# EAGLE board Board_iTEAD (EAGLE 7.2.0)
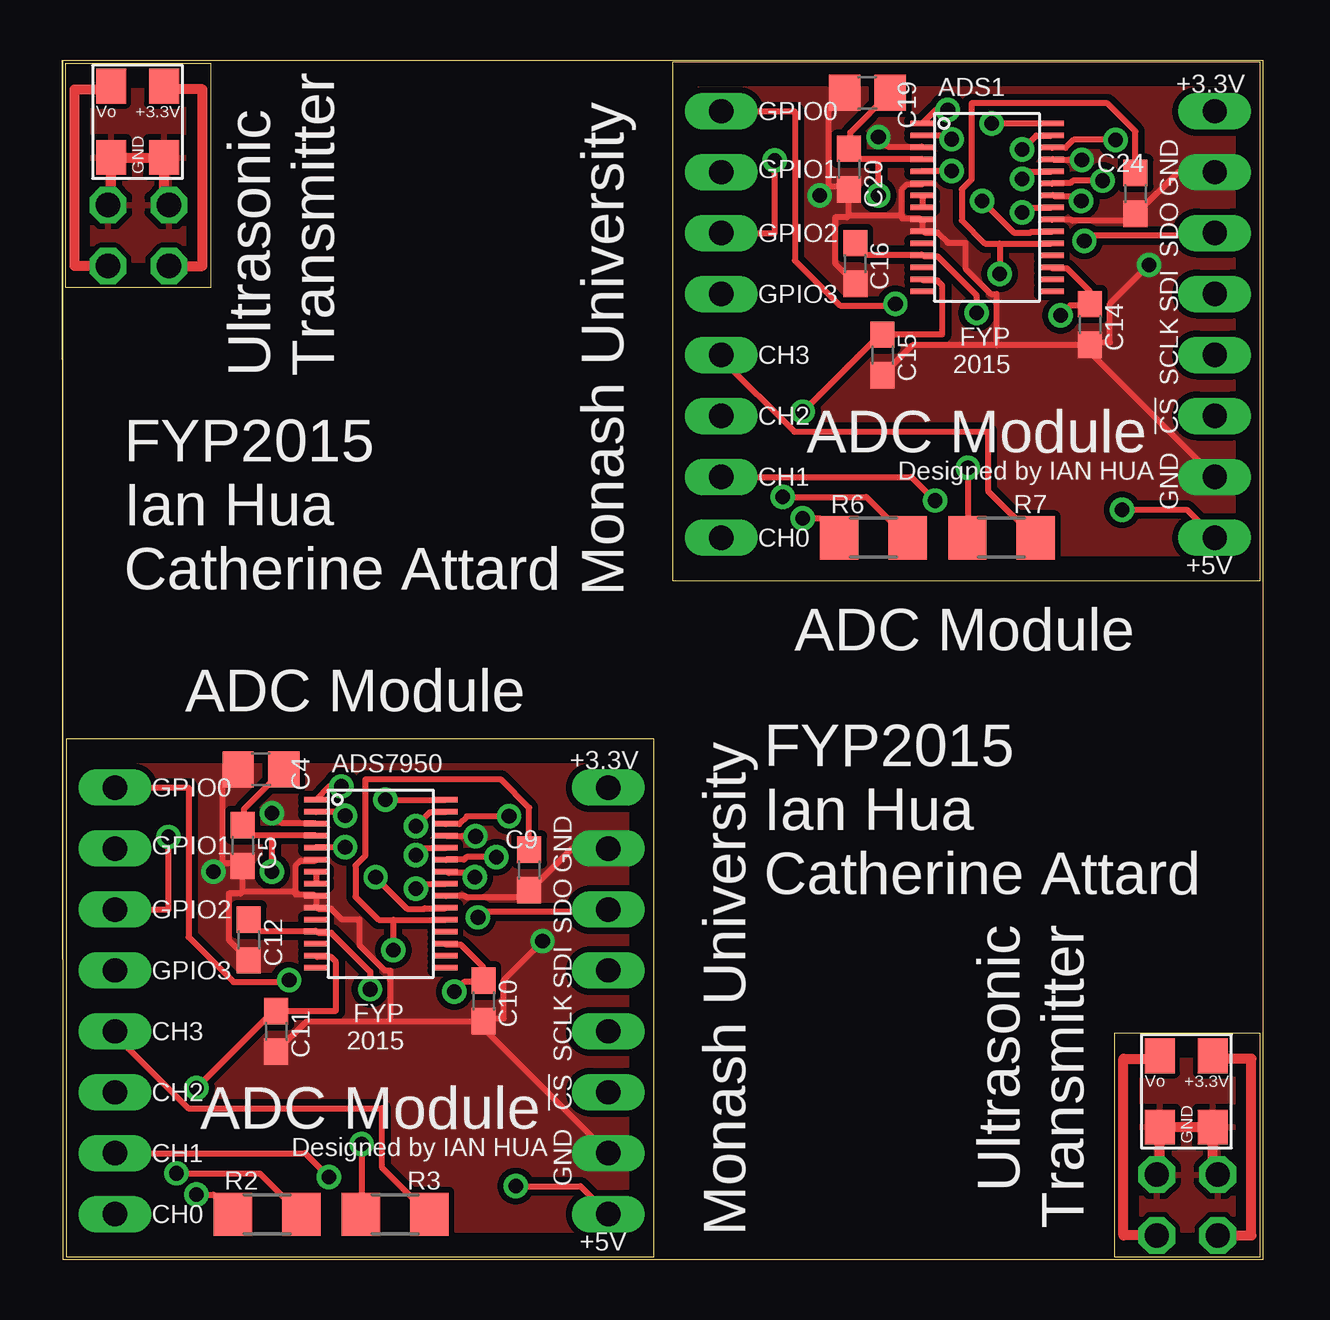
[diagram p0: board, top side]
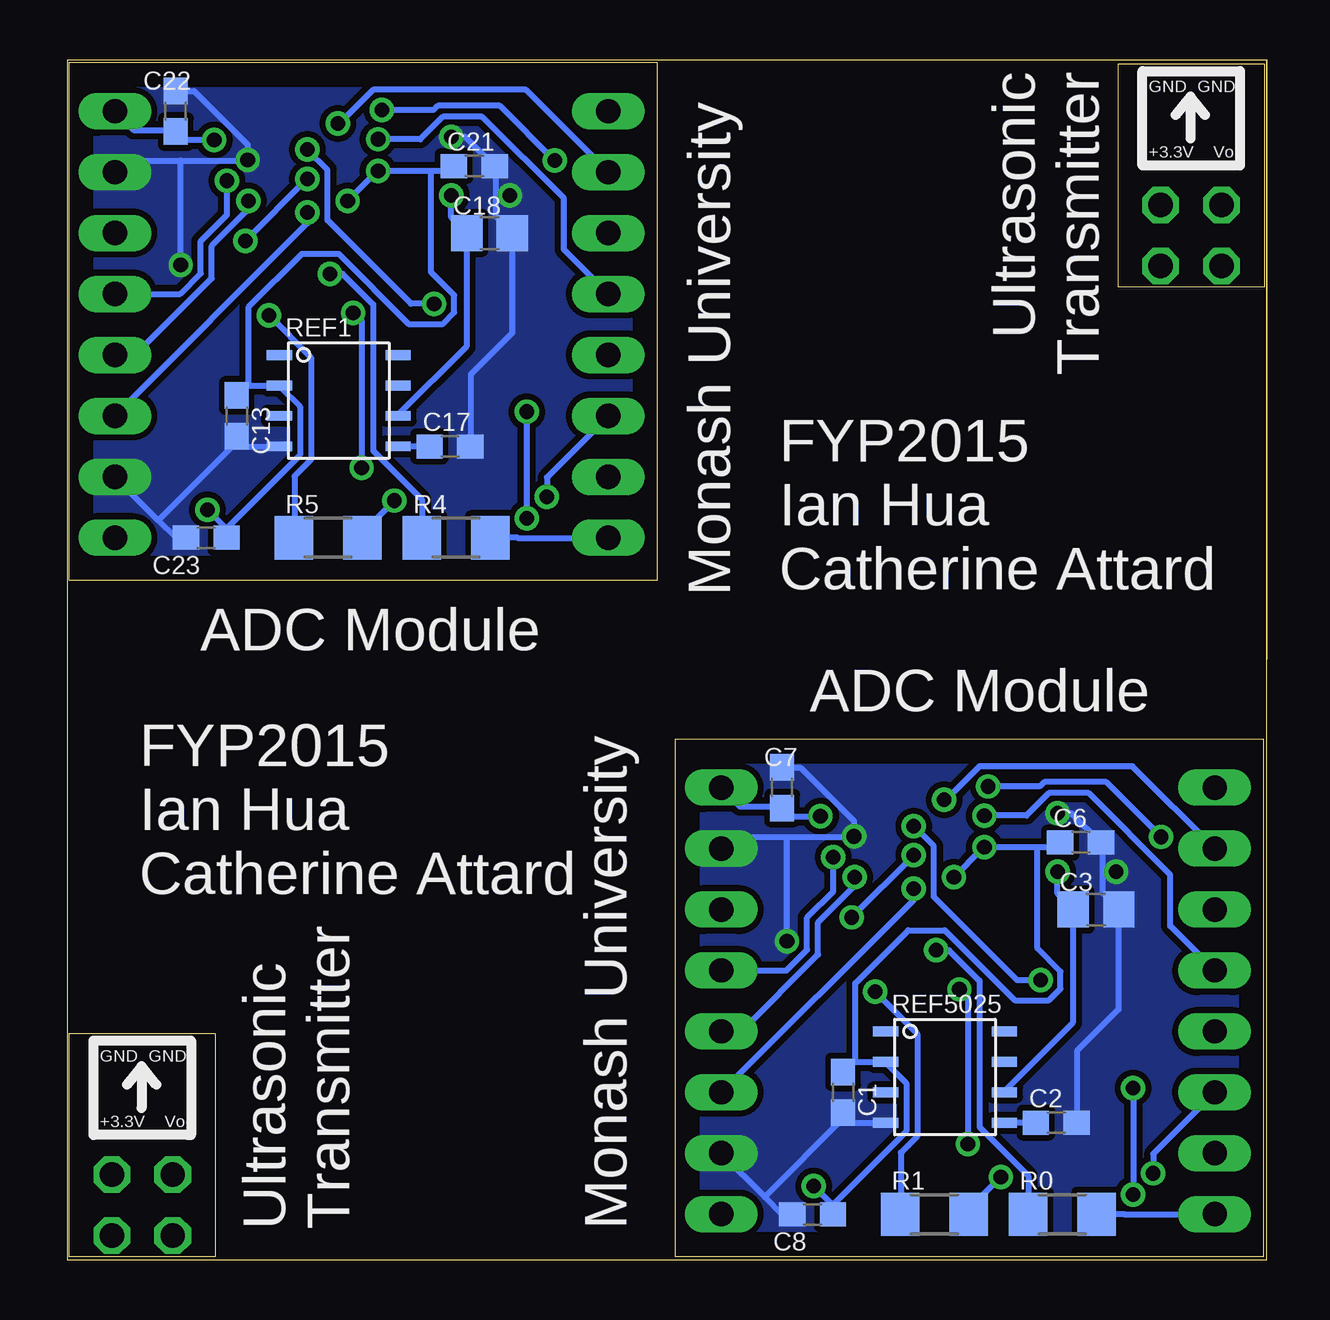
[diagram p1: board, bottom side, seen from below]

Size 50.02 x 50.02 mm. Coordinates in mm from the lower left corner, seen from the top.
Outline: 0.03,0 0,50.02 50.02,50
Outline: 50.02,50 50.02,0
Outline: 50.02,0 0.03,0
Outline: 0.03,0 0.03,50 50.02,50
Outline: 50.02,50 50.02,0
Outline: 50.02,0 0.03,0
Outline: 0.15,0.13 24.66,0.13 24.66,21.72 0.15,21.72 0.15,0.13
Outline: 25.42,28.32 49.94,28.32 49.94,49.91 25.42,49.91 25.42,28.32
Outline: 0.12,40.54 6.21,40.54 6.21,49.86 0.12,49.86 0.12,40.54
Outline: 43.84,0.13 49.92,0.13 49.92,9.45 43.84,9.45 43.84,0.13
Copper layers (1*16): Top 0.035mm / dielectric 1.5mm / Bottom 0.035mm
Design rules "default": minimum track width 10mil, minimum drill 24mil, track to track 8mil, track to pad 8mil, pad to pad 8mil, via to via 8mil, smd to smd 8mil, copper to edge 40mil, drill to drill 8mil, minimum pad ring 10mil, minimum via ring 8mil, stop-mask expansion 4mil, vias tented up to drill 0mil, thermal gap 10mil

## Footprints (pad centres in the part's own frame; a part is rotated, then mirrored left to right if it is on the bottom)
TSSOP-30 = smd 0.22 x 1: P$1 0,0; P$2 0.5,0; P$3 1,0; P$4 1.5,0; P$5 2,0; P$6 2.5,0; P$7 3,0; P$8 3.5,0; P$9 4,0; P$10 4.5,0; P$11 5,0; P$12 5.5,0; P$13 6,0; P$14 6.5,0; P$15 7,0; P$16 7,5.4; P$17 6.5,5.4; P$18 6,5.4; P$19 5.5,5.4; P$20 5,5.4; P$21 4.5,5.4; P$22 4,5.4; P$23 3.5,5.4; P$24 3,5.4; P$25 2.5,5.4; P$26 2,5.4; P$27 1.5,5.4; P$28 1,5.4; P$29 0.5,5.4; P$30 0,5.4
C0603 = smd 1.1 x 1: 1 -0.85,0; 2 0.85,0
C0805 = smd 1.3 x 1.5: 1 -0.95,0; 2 0.95,0
1X08 = drill 1.016 long: 1 -8.89,0; 2 -6.35,0; 3 -3.81,0; 4 -1.27,0; 5 1.27,0; 6 3.81,0; 7 6.35,0; 8 8.89,0
2X02 = drill 1.016 octagon: 1 -1.27,-1.27; 2 -1.27,1.27; 3 1.27,-1.27; 4 1.27,1.27
R1206 = smd 1.6 x 1.803: 1 -1.422,0; 2 1.422,0
SOIC-8 = smd 0.41 x 1.05: P$1 0,0; P$2 1.27,0; P$3 2.54,0; P$4 3.81,0; P$5 3.81,4.95; P$6 2.54,4.95; P$7 1.27,4.95; P$8 0,4.95
KNOWLES_SPM = smd 1.245 x 1.448: P$1 -1.016,1.27; P$2 -1.016,-1.702; P$3 1.194,-1.702; P$4 1.194,1.27

## Placement (x,y rotation side)
ADS1  ADS7950  [TSSOP-30]  35.84,47.37 270 top
ADS7950  ADS7950  [TSSOP-30]  10.57,19.18 270 top
C1  1.0uF  [C0603]  17.68,6.99 270 bottom
C2  1.0uF  [C0603]  8.79,5.71 0 bottom
C3  10uF  [C0805]  7.14,14.61 0 bottom
C4  10uF  [C0805]  8.28,20.45 180 top
C5  1.0uF  [C0603]  7.52,17.27 270 top
C6  1.0uF  [C0603]  7.77,17.4 0 bottom
C7  0.1uF  [C0603]  20.22,19.68 90 bottom
C8  0.1uF  [C0603]  18.95,1.91 180 bottom
C9  270pF  [C0603]  19.46,16.26 270 top
C10  270pF  [C0603]  17.55,10.79 270 top
C11  270pF  [C0603]  8.92,9.53 270 top
C12  270pF  [C0603]  7.77,13.34 270 top
C13  1.0uF  [C0603]  42.95,35.18 270 bottom
C14  270pF  [C0603]  42.82,38.99 270 top
C15  270pF  [C0603]  34.19,37.72 270 top
C16  270pF  [C0603]  33.05,41.53 270 top
C17  1.0uF  [C0603]  34.06,33.91 0 bottom
C18  10uF  [C0805]  32.41,42.8 0 bottom
C19  10uF  [C0805]  33.55,48.64 180 top
C20  1.0uF  [C0603]  32.79,45.47 270 top
C21  1.0uF  [C0603]  33.05,45.59 0 bottom
C22  0.1uF  [C0603]  45.49,47.88 90 bottom
C23  0.1uF  [C0603]  44.22,30.1 180 bottom
C24  270pF  [C0603]  44.73,44.45 270 top
JP1  Left Header  [1X08]  2.18,10.79 270 top
JP2  Right Header  [1X08]  22.76,10.79 270 top
JP3  Left Header  [1X08]  27.46,38.99 270 top
JP4  Right Header  [1X08]  48.03,38.99 270 top
JP5  [2X02]  3.17,42.7 90 top
JP6  [2X02]  46.89,2.29 90 top
R0  33Ohm  [R1206]  8.53,1.91 0 bottom
R1  33Ohm  [R1206]  13.87,1.91 0 bottom
R2  33Ohm  [R1206]  8.53,1.91 0 top
R3  33Ohm  [R1206]  13.87,1.91 0 top
R4  33Ohm  [R1206]  33.81,30.1 0 bottom
R5  33Ohm  [R1206]  39.14,30.1 0 bottom
R6  33Ohm  [R1206]  33.81,30.1 0 top
R7  33Ohm  [R1206]  39.14,30.1 0 top
REF1  REF5025  [SOIC-8]  41.17,37.72 270 bottom
REF5025  REF5025  [SOIC-8]  15.9,9.53 270 bottom
SPM0404UD1  SPM0404UD5  [KNOWLES_SPM]  46.76,7.24 0 top
SPM0404UD5  SPM0404UD5  [KNOWLES_SPM]  3.04,47.65 0 top

## Library data of the parts
ADS1 ADS7950 REF1 REF5025 SPM0404UD1 SPM0404UD5 = Ian
C1-C24 R0 R1-R7 = rcl
JP1-JP6 = Ian_Header

## Nets
+3V1: ADS1.P$28 C22.1 JP4.1
+3V2: JP5.1 SPM0404UD5.P$4
+3V3: ADS7950.P$28 C7.1 JP2.1
+3V4: JP6.1 SPM0404UD1.P$4
+5V: ADS7950.P$5 ADS7950.P$21 C1.1 C6.1 C8.1 JP2.8 REF5025.P$2
+5V1: ADS1.P$5 ADS1.P$21 C13.1 C21.1 C23.1 JP4.8 REF1.P$2
GND: ADS7950.P$3 ADS7950.P$6 ADS7950.P$9 ADS7950.P$10 ADS7950.P$22 ADS7950.P$27 C1.2 C2.2 C3.2 C4.2 C5.2 C6.2 C7.2 C8.2 C9.2 C10.2 C11.2 C12.2 JP2.2 JP2.7 REF5025.P$4
GND1: ADS1.P$3 ADS1.P$6 ADS1.P$9 ADS1.P$10 ADS1.P$22 ADS1.P$27 C13.2 C14.2 C15.2 C16.2 C17.2 C18.2 C19.2 C20.2 C21.2 C22.2 C23.2 C24.2 JP4.2 JP4.7 REF1.P$4
GND2: JP5.3 JP5.4 SPM0404UD5.P$2 SPM0404UD5.P$3
GND3: JP6.3 JP6.4 SPM0404UD1.P$2 SPM0404UD1.P$3
N$1: C2.1 REF5025.P$5
N$2: C17.1 REF1.P$5
N$3: ADS7950.P$29 JP1.1
N$4: ADS7950.P$7 ADS7950.P$8
N$5: ADS7950.P$30 JP1.2
N$6: ADS7950.P$1 JP1.3
N$7: ADS7950.P$2 JP1.4
N$8: ADS1.P$29 JP3.1
N$9: JP1.7 R1.2
N$10: JP1.6 R2.2
N$11: JP1.5 R3.2
N$12: ADS1.P$30 JP3.2
N$13: ADS7950.P$18 C10.1 R1.1
N$14: ADS7950.P$14 C11.1 R2.1
N$15: JP1.8 R0.2
N$16: ADS7950.P$23 JP2.6
N$17: ADS7950.P$12 C12.1 R3.1
N$18: ADS7950.P$26 JP2.3
N$19: ADS7950.P$25 JP2.4
N$20: ADS7950.P$24 JP2.5
N$21: ADS7950.P$20 C9.1 R0.1
N$22: ADS1.P$1 JP3.3
N$23: ADS1.P$2 JP3.4
N$24: JP3.8 R4.2
N$25: JP3.7 R5.2
N$26: JP3.6 R6.2
N$27: JP3.5 R7.2
N$28: ADS1.P$18 C14.1 R5.1
N$29: ADS1.P$14 C15.1 R6.1
N$30: ADS1.P$12 C16.1 R7.1
N$31: ADS1.P$26 JP4.3
N$32: ADS1.P$25 JP4.4
N$33: ADS1.P$24 JP4.5
N$34: ADS1.P$23 JP4.6
N$35: ADS1.P$20 C24.1 R4.1
N$36: ADS1.P$7 ADS1.P$8
N$37: JP5.2 SPM0404UD5.P$1
N$38: JP6.2 SPM0404UD1.P$1
REFP: ADS7950.P$4 C3.1 C4.1 C5.1 REF5025.P$6
REFP1: ADS1.P$4 C18.1 C19.1 C20.1 REF1.P$6

## Tracks (layer width: path | path; a pad name or v marks a point on that pad's centre or on a via)
+3V1  (via drill 0.61)
  Top 0.254: v43.89,46.69 42.14,46.69 41.81,46.35 41.25,46.35 ADS1.P$28
  Bottom 0.254: v43.89,46.69 45.16,46.69 45.49,47.02 C22.1 45.59,47.09 47.24,47.09 JP4.1
+3V2
  Top 0.406: JP5.1 5.84,41.43 5.84,48.79 4.24,48.79 SPM0404UD5.P$4
+3V3  (via drill 0.61)
  Top 0.254: v18.62,18.49 16.86,18.49 16.54,18.16 15.98,18.16 ADS7950.P$28
  Bottom 0.254: v18.62,18.49 19.89,18.49 C7.1 20.32,18.9 21.97,18.9 JP2.1
+3V4
  Top 0.406: JP6.1 49.55,1.02 49.55,8.38 47.95,8.38 SPM0404UD1.P$4
+5V  (via drill 0.61)
  Top 0.254: v11.79,17.2 10.57,17.2 ADS7950.P$5 | v13.05,15.95 14.38,14.63 15.09,14.63 15.11,14.66 15.95,14.66 ADS7950.P$21 | JP2.8 21.59,3.07 v18.9,3.07
  Bottom 0.254: 9.58,17.2 8.84,17.2 8.64,17.4 C6.1 | 9.58,17.2 v11.79,17.2 11.89,17.12 v13.05,15.95 | 17.17,8.26 17.27,8.26 17.68,7.85 C1.1 | 17.17,8.26 REF5025.P$2 15.82,8.15 15.04,7.37 15.04,5.36 18.08,2.31 C8.1 18.19,2.36 v18.9,3.07 | 9.58,17.2 9.58,12.98 8.61,12.01 8.61,11.3 9.09,10.82 10.52,10.82 13.44,13.74 14.96,13.74 17.17,11.53 17.17,8.26
+5V1  (via drill 0.61)
  Top 0.254: v37.06,45.39 35.84,45.39 ADS1.P$5 | v38.33,44.15 39.65,42.82 40.36,42.82 40.39,42.85 41.22,42.85 ADS1.P$21 | JP4.8 46.86,31.27 v44.17,31.27
  Bottom 0.254: 34.85,45.39 34.11,45.39 33.91,45.59 C21.1 | 34.85,45.39 v37.06,45.39 37.16,45.31 v38.33,44.15 | 42.44,36.45 42.55,36.45 42.95,36.04 C13.1 | 42.44,36.45 REF1.P$2 41.1,36.35 40.31,35.56 40.31,33.55 43.36,30.5 43.36,30.1 C23.1 43.46,30.56 v44.17,31.27 | 34.85,45.39 34.85,41.17 33.88,40.21 33.88,39.5 34.37,39.01 35.79,39.01 38.71,41.94 40.23,41.94 42.44,39.73 42.44,36.45
GND  (via drill 0.61)
  Top 0.254: v8.74,18.62 9.14,18.21 10.54,18.21 ADS7950.P$3 | v17.22,17.65 16.05,17.65 16.03,17.68 15.98,17.68 ADS7950.P$27 | ADS7950.P$22 15.98,15.16 16.79,15.16 16.84,15.11 19.18,15.11 19.46,15.39 C9.2 19.56,15.47 21.23,17.14 JP2.2 | 13.67,9.93 17.55,9.93 C10.2 | 13.67,9.93 10.16,9.93 C11.2 | 9.73,15.34 9.73,15.21 10.46,15.21 ADS7950.P$9 ADS7950.P$10 10.67,14.63 11.2,14.63 11.63,14.2 12.37,14.2 12.37,13.13 13.44,12.06 13.67,12.06 13.67,9.93 | 9.73,15.34 9.73,16.43 9.93,16.64 10.54,16.64 10.57,16.66 ADS7950.P$6 | 7.52,15.34 C5.2 7.47,16.54 6.68,16.54 | 9.73,15.34 7.52,15.34 | C12.2 6.93,13.34 6.93,15.27 7.42,15.27 7.52,15.34 | 6.68,16.54 6.68,19.81 7.32,20.45 C4.2 | JP2.7 17.37,9.83 C10.2 | v20.01,13.28 18.39,11.66 18.39,10.06 17.63,10.06 C10.2 | v6.3,16.18 6.58,16.46 6.68,16.54
  Bottom 0.254: v8.74,18.62 8.15,18.62 C6.2 6.86,17.3 6.86,16.18 | C2.2 7.92,8.71 6.2,10.44 6.2,14.61 C3.2 6.27,14.71 6.86,15.29 6.86,16.18 | C7.2 20.22,20.52 19.46,20.52 17.22,18.29 v17.22,17.65 17.32,17.63 20.01,17.63 | 20.01,17.63 22.27,17.63 JP2.2 | REF5025.P$4 17.27,5.71 17.68,6.12 C1.2 17.65,5.92 20.94,2.63 | C8.2 20.22,1.91 20.94,2.63 | JP2.7 20.94,2.63 | v20.01,13.28 20.01,17.63 | v6.3,16.18 6.86,16.18
  pour Bottom (isolate 0.254, no thermals): 0.15,0.13 0.15,21.72 24.66,21.72 24.66,0.13
  pour Top (isolate 0.254, no thermals): 0.15,0.13 0.15,21.72 24.66,21.72 24.66,0.13
GND1  (via drill 0.61)
  Top 0.254: v34.01,46.81 34.42,46.41 35.81,46.41 ADS1.P$3 | v42.49,45.85 41.32,45.85 41.3,45.87 41.25,45.87 ADS1.P$27 | ADS1.P$22 41.25,43.36 42.06,43.36 42.11,43.31 44.45,43.31 44.73,43.59 C24.2 44.83,43.66 46.51,45.34 JP4.2 | 38.94,38.12 42.82,38.12 C14.2 | 38.94,38.12 35.43,38.12 34.19,36.88 C15.2 | 35,43.54 35,43.41 35.74,43.41 ADS1.P$9 ADS1.P$10 35.94,42.82 36.47,42.82 36.91,42.39 37.64,42.39 37.64,41.33 38.71,40.26 38.94,40.26 38.94,38.12 | 35,43.54 35,44.63 35.2,44.83 35.81,44.83 35.84,44.86 ADS1.P$6 | 32.79,43.54 C20.2 32.74,44.73 31.95,44.73 | 35,43.54 32.79,43.54 | C16.2 33.05,40.69 32.21,41.53 32.21,43.46 32.69,43.46 32.79,43.54 | 31.95,44.73 31.95,48.01 32.59,48.64 C19.2 | JP4.7 42.65,38.02 C14.2 | v45.29,41.48 43.66,39.85 43.66,38.25 42.9,38.25 C14.2 | v31.57,44.37 31.85,44.65 31.95,44.73
  Bottom 0.254: v34.01,46.81 33.43,46.81 32.21,45.59 C21.2 32.13,45.49 32.13,44.37 | C17.2 33.2,33.91 33.2,36.91 31.47,38.63 31.47,42.8 C18.2 31.55,42.9 32.13,43.48 32.13,44.37 | C22.2 45.49,48.72 44.73,48.72 42.49,46.48 v42.49,45.85 42.59,45.82 45.29,45.82 | 45.29,45.82 47.55,45.82 JP4.2 | REF1.P$4 42.55,33.91 42.95,34.31 C13.2 42.93,34.11 46.21,30.82 | C23.2 45.49,30.1 46.21,30.82 | JP4.7 46.21,30.82 | v45.29,41.48 45.29,45.82 | v31.57,44.37 32.13,44.37
  pour Bottom (isolate 0.254, no thermals): 25.42,28.32 25.42,49.91 49.94,49.91 49.94,28.32
  pour Top (isolate 0.254, no thermals): 25.42,28.32 25.42,49.91 49.94,49.91 49.94,28.32
GND2
  Top 0.406: JP5.4 2.03,43.97 SPM0404UD5.P$2 SPM0404UD5.P$3 4.24,43.97 JP5.3
  pour Top: 0.12,40.54 0.12,49.94 6.22,49.94 6.22,40.54
GND3
  Top 0.406: JP6.4 45.74,3.56 SPM0404UD1.P$2 SPM0404UD1.P$3 47.95,3.56 JP6.3
  pour Top: 43.84,0.13 43.84,9.53 49.94,9.53 49.94,0.13
N$1
  Bottom 0.254: C2.1 REF5025.P$5
N$2
  Bottom 0.254: C17.1 REF1.P$5
N$3  (via drill 0.61)
  Top 0.254: v14.73,18.09 15.32,18.67 15.95,18.67 ADS7950.P$29 | v9.45,11.66 9.37,11.58 7.14,11.58 5.26,13.46 5.26,19.68 JP1.1
  Bottom 0.254: v14.73,18.09 13.89,17.25 13.89,15.14 10.41,11.66 v9.45,11.66
N$4
  Top 0.254: ADS7950.P$7 ADS7950.P$8
N$5  (via drill 0.61)
  Top 0.254: v13.46,19.18 ADS7950.P$30
  Bottom 0.254: v13.46,19.18 13.38,19.18 11.99,20.57 5.61,20.57 JP1.2
N$6  (via drill 0.61)
  Top 0.254: ADS7950.P$1 11.12,19.74 v11.63,19.74 | v4.42,17.63 4.42,14.61 JP1.3
  Bottom 0.254: v11.63,19.74 9.47,19.74 9.3,19.91 6.71,19.91 v4.42,17.63
N$7  (via drill 0.61)
  Top 0.254: v11.79,18.52 11.63,18.67 ADS7950.P$2
  Bottom 0.254: v11.79,18.52 10.03,18.52 9.09,19.46 7.44,19.46 4.04,16.05 4.04,13.92 JP1.4
N$8  (via drill 0.61)
  Top 0.254: v40,46.28 40.59,46.86 41.22,46.86 ADS1.P$29 | v34.72,39.85 34.64,39.78 32.41,39.78 30.53,41.66 30.53,47.88 JP3.1
  Bottom 0.254: v40,46.28 39.17,45.44 39.17,43.33 35.69,39.85 v34.72,39.85
N$9  (via drill 0.61)
  Top 0.254: v11.1,3.45 10.11,4.45 JP1.7
  Bottom 0.254: R1.2 12.45,2.11 v11.1,3.45 | R1.2
N$10  (via drill 0.61)
  Top 0.254: v4.75,3.61 8.23,3.61 9.93,1.91 R2.2
  Bottom 0.254: v4.75,3.61 4.75,4.42 JP1.6
N$11
  Top 0.254: JP1.5 2.18,9.37 5.23,6.33 13.31,6.33 13.31,3.86 15.27,1.91 R3.2
N$12  (via drill 0.61)
  Top 0.254: v38.73,47.37 ADS1.P$30
  Bottom 0.254: v38.73,47.37 38.66,47.37 37.26,48.77 30.89,48.77 JP3.2
N$13  (via drill 0.61)
  Top 0.254: ADS7950.P$18 15.98,13.16 16,13.13 16.61,13.13 17.55,12.19 C10.1 17.45,11.58 16.74,11.58 v16.33,11.18
  Bottom 0.254: v16.33,11.18 14.58,9.42 14.58,5.16 15.27,4.47 15.27,1.91 R1.1
N$14  (via drill 0.61)
  Top 0.254: ADS7950.P$14 10.62,12.62 11.2,12.62 11.4,12.42 11.4,10.39 C11.1 8.81,10.31 8.74,10.31 v5.59,7.16 | R2.1 6.3,2.72 v5.59,2.72 | R2.1
  Bottom 0.254: v5.59,7.16 v5.59,2.72
N$15
  Bottom 0.254: R0.2 5.97,1.91 5.94,1.88 2.21,1.88 JP1.8
N$16  (via drill 0.61)
  Top 0.254: v14.73,15.47 14.94,15.67 15.95,15.67 ADS7950.P$23
  Bottom 0.254: v14.73,15.47 14.73,15.01 JP2.6
N$17  (via drill 0.61)
  Top 0.254: C12.1 7.77,14.17 8.23,13.72 10.54,13.72 10.57,13.69 ADS7950.P$12 10.67,13.64 11.2,13.64 12.83,12.01 v12.83,11.28 | v12.47,4.83 12.47,1.91 R3.1
  Bottom 0.254: v12.47,4.83 12.47,10.92 v12.83,11.28
N$18  (via drill 0.61)
  Top 0.254: v14.73,16.87 15.04,17.17 15.95,17.17 ADS7950.P$26 | v17.32,14.28 17.55,14.5 22.66,14.5 JP2.3
  Bottom 0.254: v17.32,14.28 v14.73,16.87
N$19  (via drill 0.61)
  Top 0.254: v18.08,16.79 16.84,16.79 16.74,16.69 16,16.69 15.98,16.66 ADS7950.P$25
  Bottom 0.254: v18.08,16.79 18.08,15.37 19.18,14.28 19.18,12.93 20.04,12.06 JP2.4
N$20  (via drill 0.61)
  Top 0.254: v17.2,15.95 17.02,16.13 16.1,16.13 16.05,16.18 15.98,16.18 ADS7950.P$24
  Bottom 0.254: v17.2,15.95 17.2,15.6 18.72,14.07 18.72,12.72 21.92,9.53 JP2.5
N$21  (via drill 0.61)
  Top 0.254: 13.79,14.17 13.18,14.17 12.22,15.14 12.22,16.43 12.62,16.84 12.62,20.02 18.29,20.02 19.46,18.85 C9.1 | 13.79,14.17 15.95,14.17 ADS7950.P$20 | 13.79,14.17 v13.79,12.9
  Bottom 0.254: R0.1 9.96,3.5 11.99,5.54 11.99,11.63 13.26,12.9 v13.79,12.9 | R0.1
N$22  (via drill 0.61)
  Top 0.254: ADS1.P$1 36.4,47.93 v36.91,47.93 | v29.69,45.82 29.69,42.8 JP3.3
  Bottom 0.254: v36.91,47.93 34.75,47.93 34.57,48.11 31.98,48.11 v29.69,45.82
N$23  (via drill 0.61)
  Top 0.254: v37.06,46.71 36.91,46.86 ADS1.P$2
  Bottom 0.254: v37.06,46.71 35.31,46.71 34.37,47.65 32.71,47.65 29.31,44.25 29.31,42.11 JP3.4
N$24
  Bottom 0.254: R4.2 31.24,30.1 31.22,30.07 27.48,30.07 JP3.8
N$25  (via drill 0.61)
  Top 0.254: v36.37,31.65 35.38,32.64 JP3.7
  Bottom 0.254: R5.2 37.72,30.3 v36.37,31.65 | R5.2
N$26  (via drill 0.61)
  Top 0.254: v30.02,31.8 33.5,31.8 35.2,30.1 R6.2
  Bottom 0.254: v30.02,31.8 30.02,32.61 JP3.6
N$27
  Top 0.254: JP3.5 27.46,37.57 30.5,34.52 38.58,34.52 38.58,32.05 40.54,30.1 R7.2
N$28  (via drill 0.61)
  Top 0.254: ADS1.P$18 41.25,41.35 41.27,41.33 41.88,41.33 42.82,40.39 C14.1 42.72,39.78 42.01,39.78 v41.6,39.37
  Bottom 0.254: v41.6,39.37 39.85,37.62 39.85,33.35 40.54,32.66 40.54,30.1 R5.1
N$29  (via drill 0.61)
  Top 0.254: ADS1.P$14 35.89,40.82 36.47,40.82 36.68,40.62 36.68,38.58 34.19,38.58 C15.1 34.09,38.51 34.01,38.51 v30.86,35.36 | R6.1 31.57,30.91 v30.86,30.91 | R6.1
  Bottom 0.254: v30.86,35.36 v30.86,30.91
N$30  (via drill 0.61)
  Top 0.254: C16.1 33.05,42.37 33.5,41.91 35.81,41.91 35.84,41.88 ADS1.P$12 35.94,41.83 36.47,41.83 38.1,40.21 v38.1,39.47 | v37.74,33.02 37.74,30.1 R7.1
  Bottom 0.254: v37.74,33.02 37.74,39.12 v38.1,39.47
N$31  (via drill 0.61)
  Top 0.254: v40,45.06 40.31,45.36 41.22,45.36 ADS1.P$26 | v42.59,42.47 42.82,42.7 47.93,42.7 JP4.3
  Bottom 0.254: v42.59,42.47 v40,45.06
N$32  (via drill 0.61)
  Top 0.254: v43.36,44.98 42.11,44.98 42.01,44.88 41.27,44.88 41.25,44.86 ADS1.P$25
  Bottom 0.254: v43.36,44.98 43.36,43.56 44.45,42.47 44.45,41.12 45.31,40.26 JP4.4
N$33  (via drill 0.61)
  Top 0.254: v42.47,44.15 42.29,44.32 41.38,44.32 41.32,44.37 41.25,44.37 ADS1.P$24
  Bottom 0.254: v42.47,44.15 42.47,43.79 43.99,42.27 43.99,40.92 47.19,37.72 JP4.5
N$34  (via drill 0.61)
  Top 0.254: v40,43.66 40.21,43.87 41.22,43.87 ADS1.P$23
  Bottom 0.254: v40,43.66 40,43.2 JP4.6
N$35  (via drill 0.61)
  Top 0.254: 39.06,42.37 38.45,42.37 37.49,43.33 37.49,44.63 37.9,45.03 37.9,48.21 43.56,48.21 44.73,47.04 C24.1 | 39.06,42.37 41.22,42.37 ADS1.P$20 | 39.06,42.37 v39.06,41.1
  Bottom 0.254: R4.1 35.23,31.7 37.26,33.73 37.26,39.83 38.53,41.1 v39.06,41.1 | R4.1
N$36
  Top 0.254: ADS1.P$7 ADS1.P$8
N$37
  Top 0.406: JP5.2 0.5,41.43 0.5,48.79 2.03,48.79 SPM0404UD5.P$1
N$38
  Top 0.406: JP6.2 44.22,1.02 44.22,8.38 45.74,8.38 SPM0404UD1.P$1
REFP  (via drill 0.61)
  Top 0.254: 8.74,17.7 7.92,17.7 C5.1 7.57,18.24 7.57,18.8 9.22,20.45 C4.1 | 8.74,17.7 10.54,17.7 ADS7950.P$4 | v8.74,16.18 8.74,17.7
  Bottom 0.254: REF5025.P$6 10.95,7.04 8.1,9.88 8.1,14.61 C3.1 8.18,14.71 8.74,15.27 v8.74,16.18
REFP1  (via drill 0.61)
  Top 0.254: 34.01,45.9 33.2,45.9 32.79,46.3 C20.1 32.84,46.43 32.84,46.99 34.49,48.64 C19.1 | 34.01,45.9 35.81,45.9 ADS1.P$4 | v34.01,44.37 34.01,45.9
  Bottom 0.254: REF1.P$6 36.22,35.23 33.38,38.08 C18.1 33.45,42.9 34.01,43.46 v34.01,44.37

## Text on the board
tPlace: +3.3V | Monash University | GPIO0 | GPIO1 | GND | GPIO2 | SDO | GPIO3 | FYP / 2015 | SDI | Ultrasonic / Transmitter | CH3 | SCLK | CH2 | ADC Module | GND | !CS! | Designed by IAN HUA | CH1 | CH0 | +5V | FYP2015 / Ian Hua / Catherine Attard | ADC Module | ADC Module | Monash University | +3.3V | GPIO0 | GPIO1 | GND | FYP2015 / Ian Hua / Catherine Attard | GPIO2 | SDO | Ultrasonic / Transmitter | GPIO3 | FYP / 2015 | SDI | CH3 | SCLK | CH2 | !CS! | ADC Module | GND | CH1 | Designed by IAN HUA | CH0 | +5V
bPlace: Ultrasonic / Transmitter | GND | GND | Monash University | Vo | +3.3V | FYP2015 / Ian Hua / Catherine Attard | ADC Module | ADC Module | FYP2015 / Ian Hua / Catherine Attard | GND | GND | Vo | +3.3V | Monash University | Ultrasonic / Transmitter